# Altium PCB 电子脚铐本体主控板V3-修改.PcbDoc
Units mil, origin at the board's own origin, x right, y up, seen from the top; angles counter-clockwise.
Board outline 787.4 x 1968.51 mil, 2 copper layers (Top Layer, Bottom Layer), stack 42.17 mil thick; 69 components, 45 nets, 207 pads, 43 vias.
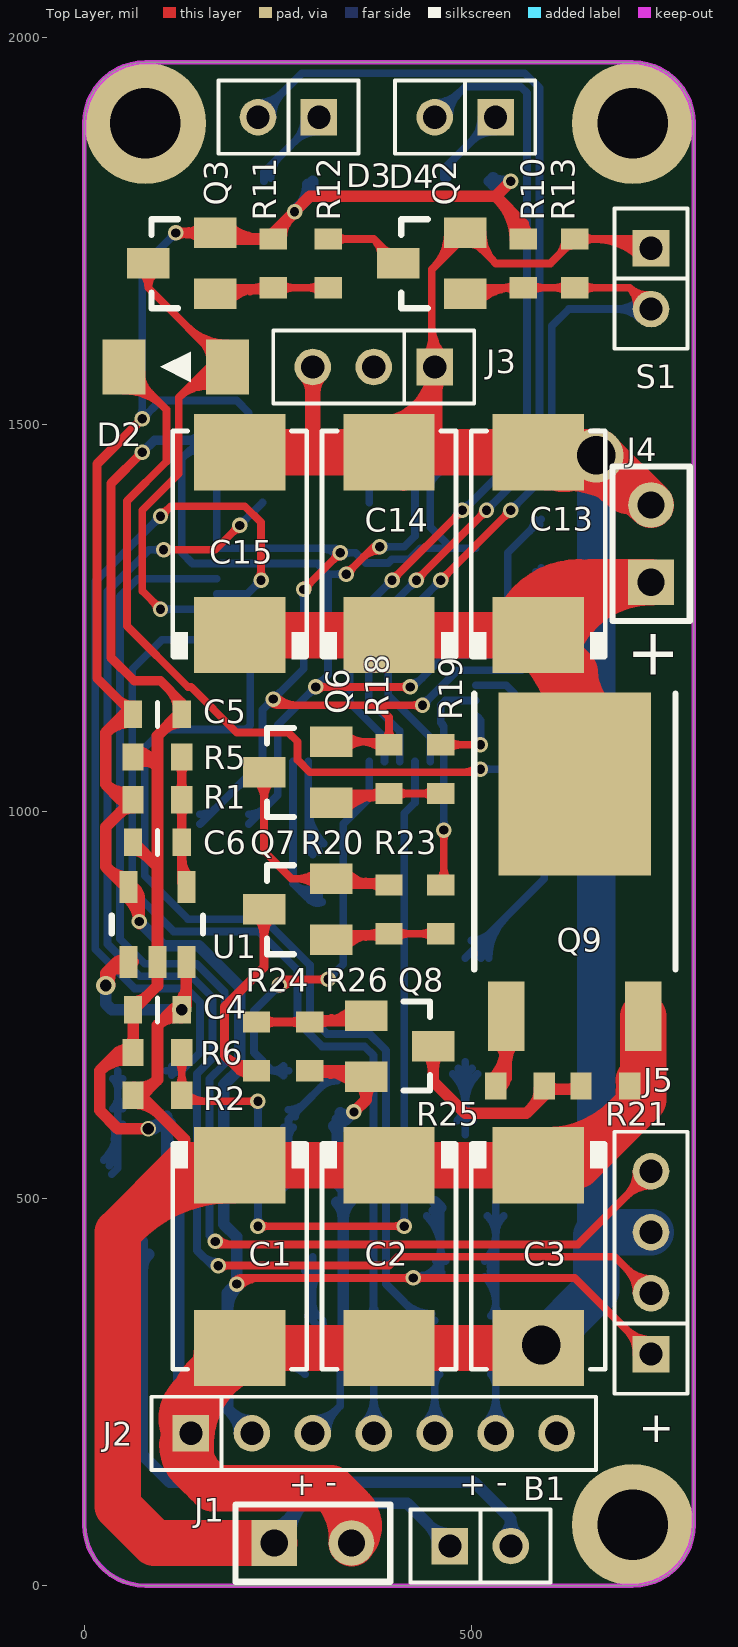
[diagram p0: Top Layer view]
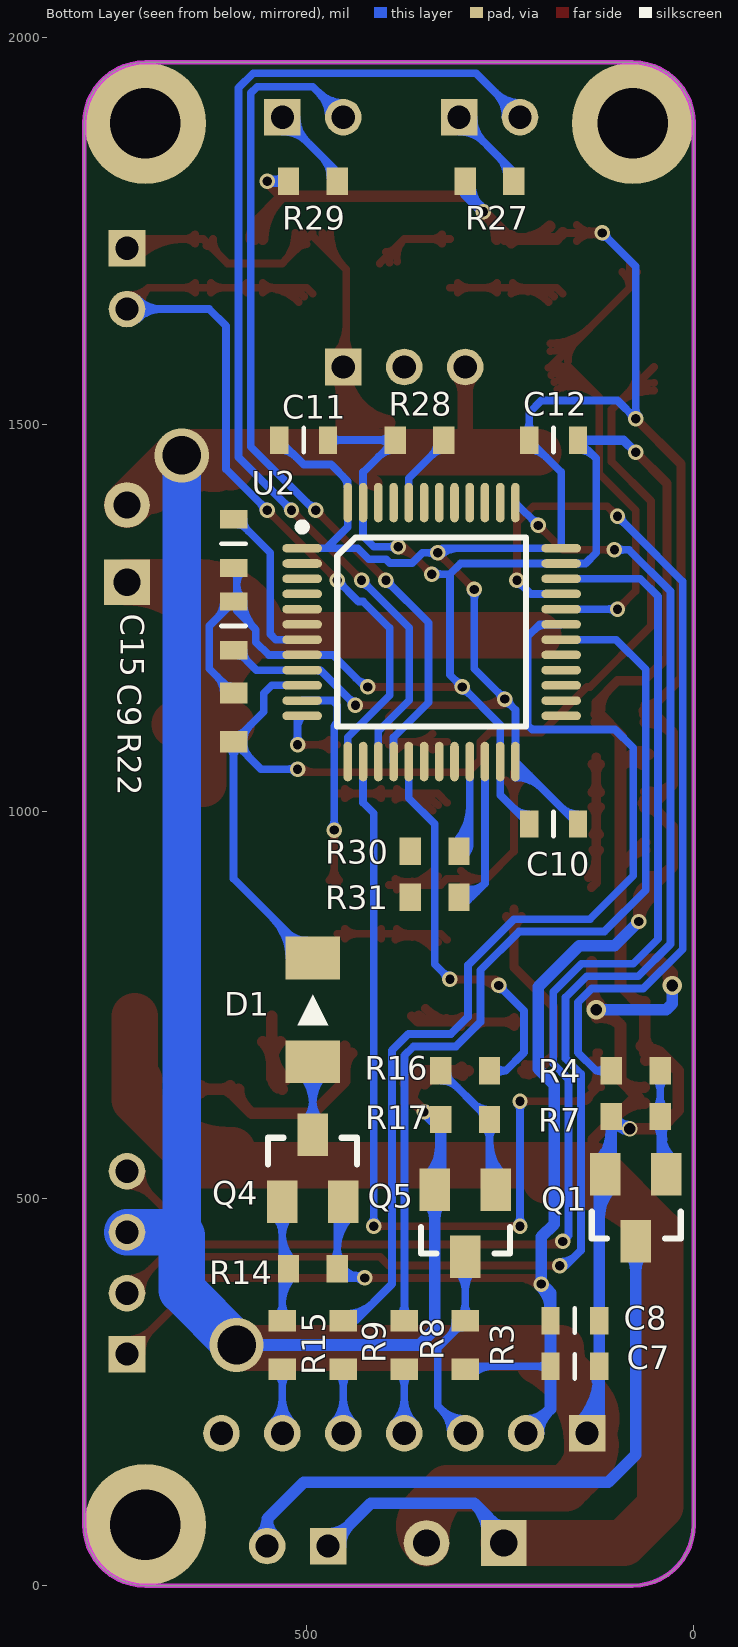
[diagram p1: Bottom Layer view, seen from below]
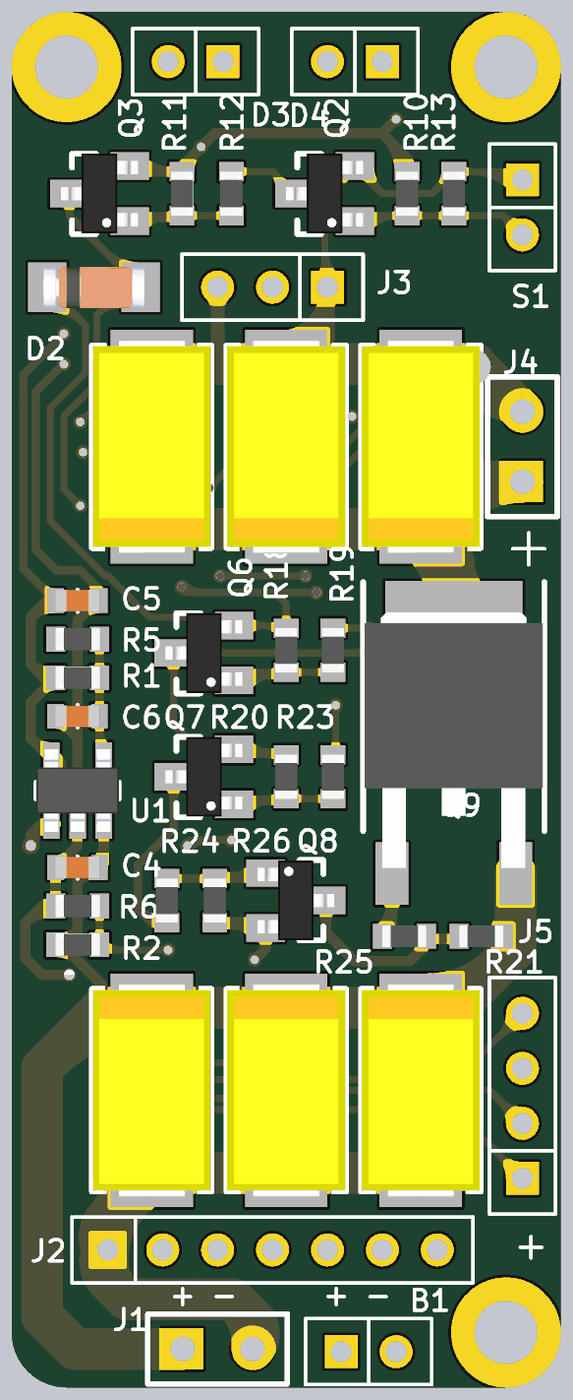
[diagram p2: 3D render of the assembled board from above, using the file's embedded part models]
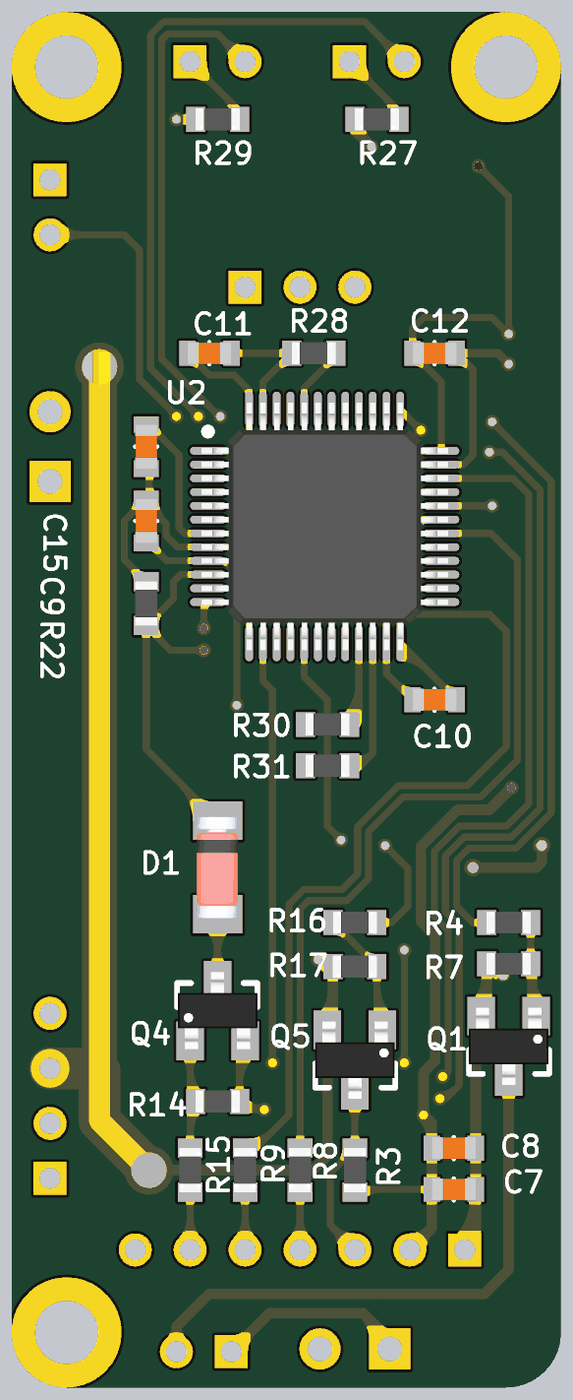
[diagram p3: 3D render of the assembled board from below, using the file's embedded part models]

## Layer stack, top to bottom
Top Solder: solder mask 0.4, Solder Resist, Dk 3.5
Top Layer: signal copper 1.4
Dielectric 1: dielectric 39.3701, FR-4, Dk 4.8
Bottom Layer: signal copper 1.4
Bottom Solder: solder mask 0.4, Solder Resist, Dk 3.5

## Board outline
0,78.74 ccw(c78.74,78.74) 78.74,0 708.66,0 ccw(c708.66,78.74) 787.4,78.74 787.4,1889.77 ccw(c708.66,1889.77) 708.66,1968.51 78.74,1968.51 ccw(c78.74,1889.77) 0,1889.77

## Design rules (kind name [scope] priority, off if disabled: settings)
Clearance [All] p1: gap=6
ComponentClearance [All] p1: gap=0 collisioncheckmode=3 verticalgap=0 showdistances=FALSE
Height [All] p1: minheight=0 maxheight=2000 prefheight=500
HoleSize [All] p1: absolutevalues=TRUE maxlimit=200 minlimit=1 maxpercent=80.000 minpercent=20.000
HoleToHoleClearance [All] p1: gap=6 allowstackedmicrovias=TRUE
MinimumSolderMaskSliver [All] p1: minsoldermaskwidth=0
PlaneConnect [All] p1: planeconnectstyle=Direct reliefexpansion=20 reliefentries=4 reliefconductorwidth=10 reliefairgap=10
PolygonConnect [All] p1: connectstyle=Direct reliefconductorwidth=10 reliefentries=4 polygonreliefangle="90 Angle" airgapwidth=10
RoutingVias [All] p1: holewidth=28 width=50 viastyle="Through Hole" minholewidth=8 minwidth=12 maxholewidth=200 maxwidth=300
SilkToSilkClearance [All] p1: silktosilkclearance=0
SilkToSolderMaskClearance [IsPad] p1: minsilkscreentomaskgap=0 clearancetoexposedcopper=TRUE
SolderMaskExpansion [All] p1: expansion=4
Width [All] p1: maxlimit=157.48 minlimit=10 preferedwidth=10
21 further rules are at their usual default settings.

## Components (designator, comment, footprint, x,y, rotation, side; value= is the part's Value field where it differs from the comment)
B1 "beep" Jk1*2-2.0 511.81,51.18 r0 top
C1 "210uF/16V" C7343 200.79,425.2 r270 top
C2 "210uF/16V" C7343 393.7,425.2 r270 top
C3 "210uF/16V" C7343 586.61,425.2 r270 top
C4 "0.1uF" C0603 94.49,744.09 r0 top
C5 "10uF" C0603 94.49,1125.98 r0 top
C6 "470pF" C0603 94.49,960.63 r180 top
C7 "10uF" C0603 153.54,283.46 r180 bottom
C8 "0.1uF" C0603 153.54,342.52 r180 bottom
C9 "0.1uF" C0603 594.49,1240.16 r90 bottom
C10 "0.1uF" C0603 181.1,984.25 r0 bottom
C11 "0.1uF" C0603 503.94,1480.31 r180 bottom
C12 "0.1uF" C0603 181.1,1480.31 r180 bottom
C13 "210uF/16V" C7343 586.61,1346.46 r90 top
C14 "210uF/16V" C7343 393.7,1346.46 r90 top
C15 "0.1uF" C0603 594.49,1346.46 r270 bottom
C15 "210uF/16V" C7343 200.79,1346.46 r90 top
D1 "1N4148" SOD-80-S 492.13,744.09 r90 bottom
D2 "1N4148" SOD-80-S 118.11,1574.8 r180 top
D3 "LED" Jk1*2-2.0 263.78,1897.64 r180 top
D4 "LED" Jk1*2-2.0 492.13,1897.64 r180 top
J1 "Jack 1x2" HDR1X2 295.28,55.12 r0 top
J2 "Jack 1x7" Jk1*7-2.0 374.02,196.85 r0 top
J3 "Jack 1x3" Jk1*3-2.0 374.02,1574.8 r180 top
J4 "Jack 1x2" HDR1X2 732.28,1346.46 r90 top
J5 "SHD1X4-2.00" Jk1*4-2.0 732.28,417.32 r90 top
Q1 "S8050" SOT-23 74.8,488.19 r0 bottom
Q2 "S8050" SOT-23 448.82,1708.66 r90 top
Q3 "S8550" SOT-23 125.98,1708.66 r90 top
Q4 "S8550" SOT-23 492.13,539.37 r180 bottom
Q5 "S8050" SOT-23 295.28,468.5 r0 bottom
Q6 "S8550" SOT-23 275.59,1051.18 r90 top
Q7 "S8550" SOT-23 275.59,874.02 r90 top
Q8 "S8050" SOT-23 407.48,696.85 r270 top
Q9 "2SA1615" TO-252 633.86,885.83 r0 top
R1 "100K" R0603 94.49,1015.75 r0 top
R2 "200K" R0603 94.49,633.86 r0 top
R3 "200K" R0603 295.28,311.02 r270 bottom
R4 "20K" R0603 74.8,665.35 r180 bottom
R5 "160K" R0603 94.49,1070.87 r180 top
R6 "100K" R0603 94.49,688.98 r180 top
R7 "10K" R0603 74.8,606.3 r180 bottom
R8 "10R" R0603 374.02,311.02 r90 bottom
R9 "10R" R0603 452.76,311.02 r90 bottom
R10 "20K" R0603 566.93,1708.66 r270 top
R11 "200K" R0603 244.09,1708.66 r270 top
R12 "100K" R0603 314.96,1708.66 r90 top
R13 "10K" R0603 633.86,1708.66 r270 top
R14 "200K" R0603 492.13,409.45 r180 bottom
R15 "100k" R0603 531.5,311.02 r270 bottom
R16 "20K" R0603 295.28,665.35 r180 bottom
R17 "10K" R0603 295.28,602.36 r0 bottom
R18 "200K" R0603 393.7,1055.12 r90 top
R19 "100K" R0603 460.63,1055.12 r90 top
R20 "200K" R0603 393.7,874.02 r90 top
R21 "200K" R0603 673.23,645.67 r180 top
R22 "200K" R0603 594.49,1122.05 r90 bottom
R23 "100K" R0603 460.63,874.02 r90 top
R24 "20K" R0603 222.44,696.85 r270 top
R25 "1K" R0603 562.99,645.67 r0 top
R26 "10K" R0603 291.34,696.85 r90 top
R27 "1K" R0603 263.78,1814.96 r180 bottom
R28 "100K" R0603 354.33,1480.31 r0 bottom
R29 "1K" R0603 492.13,1814.96 r180 bottom
R30 "NC" R0603 334.65,948.82 r180 bottom
R31 "NC" R0603 334.65,889.76 r180 bottom
S1 "Switch" Jk1*2-2.0 732.28,1688.98 r270 top
U1 "MIC5219YM5" SOT-23-5 94.49,854.33 r90 top
U2 "STM32F103CB" LQFP48 338.58,1232.28 r180 bottom locked

## Footprints (in the part's own frame and the unit in brackets; to place one, negate y for a bottom-side part, rotate by r counter-clockwise, add the part's x,y. Pads: shape width x height; smd on the part's side, far side on the other; paste and mask are expansions set on the pad)
C0603 [mm]
  rect 0.6x0.9 smd: 1(-0.8,0) 2(0.8,0)
  silkscreen extent 0,-0.4 0,0.4, body extent -0.8,-0.4 0.8,0.4, height 0.5
C7343 [mm] "100uF/25V"
  rect 2.5x3 smd: 1(-3,0) 2(3,0)
  silkscreen extent -3.8,-2.2 3.7,2.2, body extent -3.87,-2.15 3.87,2.15, height 2.9
HDR1X2 [mm] "Connector; Header; 2 Position"
  rect 1.5x1.5 hole 0.9: 1(-1.27,0)
  round 1.5 hole 0.9: 2(1.27,0)
  silkscreen extent -2.54,-1.27 2.54,1.27
Jk1*2-2.0 [mm]
  rect 1.2x1.2 hole 0.762: 1(-1,0)
  round 1.2 hole 0.762: 2(1,0)
  silkscreen extent -2.3,-1.2 2.3,1.2
Jk1*3-2.0 [mm]
  rect 1.2x1.2 hole 0.762: 1(-2,0)
  round 1.2 hole 0.762: 2(0,0) 3(2,0)
  silkscreen extent -3.3,-1.2 3.3,1.2
Jk1*4-2.0 [mm] "4P，直插，2.0mm间距，排母"
  rect 1.2x1.2 hole 0.762: 1(-3,0)
  round 1.2 hole 0.762: 2(-1,0) 3(1,0) 4(3,0)
  silkscreen extent -4.3,-1.2 4.3,1.2, body extent -4.25,-1.22 4.25,1.18, height 4.3
Jk1*7-2.0 [mm]
  rect 1.2x1.2 hole 0.762: 1(-6,0)
  round 1.2 hole 0.762: 2(-4,0) 3(-2,0) 4(0,0) 5(2,0) 6(4,0) 7(6,0)
  silkscreen extent -7.3,-1.2 7.3,1.2
LQFP48 [mm]
  oval 1.3x0.28 smd: 1(-4.25,2.75) 2(-4.25,2.25) 3(-4.25,1.75) 4(-4.25,1.25) 5(-4.25,0.75) 6(-4.25,0.25) 7(-4.25,-0.25) 8(-4.25,-0.75) 9(-4.25,-1.25) 10(-4.25,-1.75) 11(-4.25,-2.25) 12(-4.25,-2.75) 25(4.25,-2.75) 26(4.25,-2.25) 27(4.25,-1.75) 28(4.25,-1.25) 29(4.25,-0.75) 30(4.25,-0.25) 31(4.25,0.25) 32(4.25,0.75) 33(4.25,1.25) 34(4.25,1.75) 35(4.25,2.25) 36(4.25,2.75)
  oval 0.28x1.3 smd: 13(-2.75,-4.25) 14(-2.25,-4.25) 15(-1.75,-4.25) 16(-1.25,-4.25) 17(-0.75,-4.25) 18(-0.25,-4.25) 19(0.25,-4.25) 20(0.75,-4.25) 21(1.25,-4.25) 22(1.75,-4.25) 23(2.25,-4.25) 24(2.75,-4.25) 37(2.75,4.25) 38(2.25,4.25) 39(1.75,4.25) 40(1.25,4.25) 41(0.75,4.25) 42(0.25,4.25) 43(-0.25,4.25) 44(-0.75,4.25) 45(-1.25,4.25) 46(-1.75,4.25) 47(-2.25,4.25) 48(-2.75,4.25)
  silkscreen extent -4.38,-3.1 3.1,3.57, body extent -4.49,-4.5 4.51,4.5, height 1.8
R0603 [mm]
  rect 0.7x0.9 smd: 1(-0.8,0) 2(0.8,0)
  body extent -0.8,-0.4 0.8,0.4, height 0.37
SOD-80-S [mm]
  rect 1.4x1.8 smd: 1(-1.7,0) 2(1.7,0)
  silkscreen extent -0.5,-0.5 0.5,0.5, body extent -1.85,-0.79 1.85,0.81, height 1.6
SOT-23 [mm]
  rect 1x1.4 smd: 1(-1,-1.1) 2(1,-1.1) 3(0,1.1)
  silkscreen extent -1.47,0.13 1.45,1, body extent -1.45,-1.4 1.45,1.4, height 1.3
SOT-23-5 [mm]
  rect 1.05x0.6 smd: 1(-1.225,0.95) 2(-1.225,0) 3(-1.225,-0.95) 4(1.225,-0.95) 5(1.225,0.95)
  silkscreen extent -0.3,-1.5 0.3,1.5, body extent -1.5,-1.5 1.5,1.5, height 1.2
TO-252 [mm]
  rect 1.2x2.28 smd: 1(-2.25,-3.816) 3(2.25,-3.816)
  rect 5x6 smd: 2(0,3.816)
  silkscreen extent -3.3,-2.27 3.3,6.78, body extent -3.25,-3.62 3.25,5.68, height 2.3

## Part data
B1: library part Speaker, "Loudspeaker"
C1 C2 C3 C13 C14 C15: library part "Cap Poll"
C4 C9 C10 C11 C12 C15: library part "Cap Semi"
C5 C6 C7 C8: library part CAP, "CAP"
D1 D2: library part DIODE-SWITCHING, "Silicon Epitaxial Planar Diodes"
J1 J2 J3 J4: "插座"
J5: library part HEADER1X4
Q1 Q2 Q5 Q8: "NPN triode, 0.5A Max"
Q3 Q4 Q6 Q7: "PNP triode"
Q9: library part MJD122
R1 R2 R5 R6 R27 R28 R29 R30 R31: library part Res
R3 R4 R7 R8 R9 R10 R11 R12 R13 R14 R15 R16 R17 R18 R19 R20 R21 R22 R23 R24 R25 R26: library part RES, "Resistor"
S1: library part Sw
U1: library part MIC5205
U2: library part STM32F103Cx

## Free pads (board coordinates)
  round 157.48 hole 90.55: ""(78.74,1889.77) ""(708.66,78.74) ""(708.66,1889.77)

## Via types
v1: diameter 20, hole 12, Top Layer to Bottom Layer, tented both sides, 38 vias
v2: diameter 70, hole 50, Top Layer to Bottom Layer, tented both sides, 2 vias
v3: diameter 25, hole 15, Top Layer to Bottom Layer, tented both sides, 2 vias
v4: diameter 20, hole 15, Top Layer to Bottom Layer, tented both sides, 1 vias

## Nets (pads, with @x,y where several pads share a name; then routed paths per layer and width w, separated by ;. In a path a pad name is that pad's centre, name@x,y a point inside that pad or via, vN(x,y) a via of type N, cw(c..) or ccw(c..) an arc to the next point about the centre after c; other vN are vias at no path point)
+3.3V: C5.1 C7.1 C8.1 C9.1 C10.1 C11.1 C12.1 J2.2 J5.1 Q3.2 Q4.2 Q6.2 R1.1 R3.2 R10.1 R11.1 R14.2 R18.2 R27.1 R29.1 U1.5 U2.1 U2.9 U2.24 U2.36 U2.48 | length 6906.1
  Top Layer w10: v1(118.11,1748.03) Q3.2 ; v1@120.61,1743.7 cw(c130.12,1727.24) 135.04,1745.6 ; v1@120.61,1752.36 ccw(c130.12,1768.83) 135.04,1750.46 ; v1@121.65,1744.5 cw(c130.18,1735.96) 130.18,1748.03 cw(c130.18,1760.1) v1@121.65,1751.57 ; Q3.2@151.03,1737.65 ccw(c125.96,1712.58) 125.96,1748.03 ccw(c125.96,1783.48) Q3.2@151.03,1758.42 ; v1@193.31,393.3 cw(c203.79,382.83) 203.79,397.64 ; v1(196.85,389.76) 204.72,397.64 ; v1@197.14,394.76 ccw(c197.72,404.64) 204.72,397.64 ; v1@200.39,386.23 cw(c227.93,358.68) 227.93,397.64 ; v1@201.84,390.06 cw(c211.72,390.64) 204.72,397.64 ; v1@240.56,1142.13 ccw(c251.03,1152.61) 251.03,1137.8 ; v1(244.09,1145.67) 251.97,1137.8 ; v1@244.39,1140.68 cw(c244.97,1130.8) 251.97,1137.8 ; v1@247.63,1149.2 ccw(c275.18,1176.75) 275.18,1137.8 ; v1@249.09,1145.38 ccw(c258.97,1144.8) 251.97,1137.8 ; v1(283.46,1287.4) v1(330.71,1334.65) ; v1@283.46,1292.4 ccw(c283.46,1304.47) 292,1295.94 ccw(c300.54,1287.4) v1@288.46,1287.4 ; Q6.2 389.76,1090.55 R18.2 393.7,1122.05 377.95,1137.8 ; v1@325.71,1334.65 cw(c313.64,1334.65) 322.17,1326.11 cw(c330.71,1317.57) v1@330.71,1329.65 ; Q6.2@337.16,1080.17 cw(c362.22,1055.1) 362.22,1090.55 cw(c362.22,1126) Q6.2@337.16,1100.94 ; 359.06,1090.55 cw(c359.06,1055.91) R18.2@383.56,1080.41 ; R18.2@387.49,1092.82 ccw(c372.51,1107.81) 393.7,1107.81 ccw(c414.9,1107.81) R18.2@399.91,1092.82 ; v1@421.66,394.1 ccw(c413.13,385.57) 413.13,397.64 ccw(c413.13,409.71) v1@421.66,401.17 ; v1@428.73,394.1 cw(c437.27,385.57) 437.27,397.64 cw(c437.27,409.71) v1@428.73,401.17 ; v1@433.47,1134.26 ccw(c424.94,1125.72) 424.94,1137.8 ccw(c424.94,1149.87) v1@433.47,1141.33 ; v1(437.01,1137.8) 377.95,1137.8 ; J5.1@713.66,299.21 ccw(c668.7,299.21) 700.49,331 ccw(c732.28,362.79) J5.1@732.28,317.83 ; J5.1 633.86,397.64 v1(425.2,397.64) 204.72,397.64 ; 251.97,1137.8 377.95,1137.8
  Top Layer w12: 42.99,1145.99 ccw(c62.99,1165.99) C5.1@62.99,1137.7 ; C5.1 16.5,1172.48 16.5,1449.57 v1(74.8,1507.87)
  Top Layer w15: 29.56,927.13 ccw(c57.09,954.65) U1.5@57.09,915.73 ; 45.55,998.31 cw(c62.99,980.87) R1.1@62.99,1005.53 ; 46.56,1016.43 ccw(c60.47,1030.33) R1.1@65,1011.2 ; C5.1@51.23,1126.04 cw(c62.68,1114.59) C5.1@63.6,1130.75 ; U1.5@54.37,890.36 cw(c26.19,855.68) v1@70.87,855.68 ; R1.1@58.55,1011.31 ccw(c47.83,1000.59) 47.83,1015.75 ccw(c47.83,1030.91) R1.1@58.55,1020.19 ; U1.5@59.39,890.06 cw(c64.33,882.24) 70.87,888.78 ; R1.1@61.54,1025.8 cw(c53.18,1061.06) 27.56,1035.43 ; C5.1@62.75,1115.77 ccw(c60.12,1069.81) 27.56,1102.36 ; C5.1 51.18,1125.98 27.56,1102.36 ; U1.5@63.83,902 cw(c51.81,887.21) 70.87,887.21 ; v1(70.87,858.27) 70.87,888.78 ; Q3.2 177.17,1740.16 R11.1 244.09,1748.03 v1(271.65,1775.59) 291.34,1795.28 531.5,1795.28 ; Q3.2@185.78,1756.65 ccw(c225.59,1796.46) 225.59,1740.16 ; R11.1@235.72,1735.72 ccw(c225,1725) 225,1740.16 ccw(c225,1755.32) R11.1@235.72,1744.6 ; R11.1@254.31,1740.16 cw(c297.99,1740.16) v1@267.1,1771.04 ; 265.18,1767.71 cw(c275.33,1761.85) v1@272.3,1773.18 ; 535.57,1791.2 cw(c484.52,1740.16) R10.1@556.71,1740.16 ; v1(551.18,1814.96) 531.5,1795.28 ; 561.18,1765.6 cw(c535.74,1740.16) R10.1@571.71,1740.16 ; R10.1@562.49,1744.6 ccw(c551.77,1755.32) 566.93,1755.32 ccw(c582.09,1755.32) R10.1@571.37,1744.6 ; R10.1 566.93,1759.84 531.5,1795.28 ; 27.56,1035.43 47.24,1015.75 R1.1 27.56,980.31 27.56,929.13 54.13,902.56 U1.5 70.87,888.78 ; 27.56,1035.43 27.56,1102.36
  Bottom Layer w10: v1@71.27,1511.41 ccw(c62.73,1519.95) 74.8,1519.95 ccw(c86.87,1519.95) v1@78.34,1511.41 ; v1@74.8,1512.87 ccw(c74.8,1524.95) 83.34,1516.41 ccw(c91.87,1507.87) v1@79.8,1507.87 ; v1@113.11,1748.03 cw(c101.04,1748.03) 109.57,1739.5 cw(c118.11,1730.96) v1@118.11,1743.03 ; v1(118.11,1748.03) 74.8,1704.72 v1(74.8,1507.87) 98.43,1531.5 196.85,1531.5 212.6,1515.75 C12.1 171.26,1438.98 U2.36 324.8,1340.55 v1(330.71,1334.65) 350.39,1334.65 363.52,1321.52 392.64,1321.52 397.64,1326.52 420.01,1326.52 434.04,1340.55 474.41,1340.55 ; C10.1 U2.24 230.32,1131.89 v1(244.09,1145.67) 283.46,1185.04 v1(283.46,1287.4) ; C10.1@149.61,996.97 ccw(c149.61,1027.67) 171.32,1005.96 ; C7.1 R3.2@291.34,283.46 ; C7.1@189.86,278.65 cw(c201.48,267.02) 201.48,283.46 cw(c201.48,299.91) C7.1@189.86,288.28 ; 190.89,1458.61 cw(c212.6,1436.9) C12.1@212.6,1467.6 ; 195.17,1029.81 cw(c230.32,994.66) U2.24@230.32,1044.37 ; C12.1@207.78,1491.04 ccw(c196.16,1502.66) 212.6,1502.66 ccw(c229.04,1502.66) C12.1@217.41,1491.04 ; 212.24,1046.88 cw(c230.32,1028.8) U2.24@230.32,1054.37 ; U2.24@229.31,1063.95 cw(c230.32,1062.94) U2.24@230.32,1064.37 ; v1@239.09,1145.67 cw(c227.02,1145.67) 235.56,1137.13 cw(c244.09,1128.6) v1@244.09,1140.67 ; v1@244.09,1150.67 ccw(c244.09,1162.74) 252.63,1154.2 ccw(c261.17,1145.67) v1@249.09,1145.67 ; 260.64,283.46 cw(c260.64,248.83) R3.2@285.13,273.32 ; v1@279.93,1283.87 cw(c271.39,1275.33) 283.46,1275.33 cw(c295.54,1275.33) v1@287,1283.87 ; 304.38,1340.55 cw(c304.38,1308.32) v1@327.17,1331.11 ; v1@334.24,1331.11 cw(c342.78,1322.57) 342.78,1334.65 cw(c342.78,1346.72) v1@334.24,1338.18 ; v1@427.7,401.97 ccw(c433.73,412.42) 436.86,400.76 ccw(c439.98,389.1) v1@429.53,395.14 ; v1@428.73,394.1 cw(c437.27,385.57) 437.27,397.64 cw(c437.27,409.71) v1@428.73,401.17 ; v1(437.01,1137.8) 437.01,1137.92 482.16,1183.07 U2.9 564.96,1183.07 C9.1@590.55,1208.66 ; v1@437.01,1142.8 ccw(c437.01,1154.57) 445.33,1146.24 ; v1@442.01,1137.8 cw(c454.38,1137.8) 445.63,1146.54 ; Q4.2@442.37,477.81 cw(c398.29,433.73) 460.63,433.73 ; 446.47,397.64 ccw(c446.47,417.24) R14.2@461.57,404.73 ; U2.48@447.36,1419.68 cw(c466.66,1419.68) 453.01,1433.33 ; Q4.2@449.44,484.88 cw(c422.44,457.87) 460.63,457.87 ; R14.2@453.87,411.11 cw(c425.2,434.88) v1(425.2,397.64) 448.82,397.64 R14.2 Q4.2@460.63,488.19 ; R14.2@454.42,419.59 ccw(c439.43,434.58) 460.63,434.58 ccw(c481.83,434.58) R14.2@466.84,419.59 ; 478.69,1179.6 cw(c485.83,1172.47) U2.9@485.83,1182.56 ; U2.1 474.41,1340.55 ; 513.72,1458.61 cw(c535.43,1436.9) C11.1@535.43,1467.6 ; C11.1 503.94,1448.82 468.5,1448.82 446.85,1427.17 U2.48 446.85,1368.11 474.41,1340.55 ; 575.56,1193.67 ccw(c560.58,1208.66) C9.1@581.77,1208.66 ; C9.1@580.32,1198.43 cw(c588.58,1190.16) C9.1@588.58,1201.85
  Bottom Layer w15: v1(70.87,858.27) 102.36,826.77 147.96,826.77 200.79,773.94 200.79,667.75 180.17,647.13 180.17,467.24 196.73,450.68 196.73,389.89 185.04,378.2 C8.1 C7.1 185.04,228.35 J2.2 ; C8.1@185.04,355.21 cw(c231.4,355.21) v1@198.62,388 ; 185.04,373.23 cw(c199.24,373.23) v1@197.21,387.29 ; J2.2@200.41,196.85 ccw(c161.49,196.85) 189.01,224.37 ccw(c216.54,251.89) J2.2@216.54,212.97 ; v1@271.01,1778.01 ccw(c267.97,1789.33) 278.12,1783.47 ; v1(271.65,1775.59) 295.28,1799.21 R27.1 ; v1@276.2,1780.14 ccw(c245.32,1811.02) R27.1@289,1811.02 ; Q4.2 Q4.2@460.63,488.19 ; R29.1 v1(551.18,1814.96) ; R29.1@528.06,1810.52 cw(c538.78,1799.8) 538.78,1814.96 cw(c538.78,1830.12) R29.1@528.06,1819.4
ADDECCUT: Q2.1 R10.2 R13.2 S1.2 U2.13 | length 1483.1
  Top Layer w10: v1(460.63,1299.21) v1(551.18,1389.76) ; v1@460.63,1304.21 ccw(c460.63,1316.28) 469.17,1307.75 ccw(c477.7,1299.21) v1@465.63,1299.21 ; Q2.1 500,1677.17 R10.2 R13.2 704.72,1677.17 S1.2 ; Q2.1@503.31,1665.98 cw(c530.32,1638.97) 530.32,1677.17 ; Q2.1@510.38,1658.91 cw(c554.46,1614.83) R10.2@554.46,1677.17 ; v1@546.18,1389.76 cw(c534.11,1389.76) 542.65,1381.23 cw(c551.18,1372.69) v1@551.18,1384.76 ; R10.2@556.78,1670.96 ccw(c541.8,1655.97) 541.8,1677.17 ccw(c541.8,1698.36) R10.2@556.78,1683.37 ; R10.2@577.07,1670.96 cw(c592.06,1655.97) 592.06,1677.17 cw(c592.06,1698.36) R10.2@577.07,1683.37 ; R13.2@623.71,1670.96 ccw(c608.73,1655.97) 608.73,1677.17 ccw(c608.73,1698.36) R13.2@623.71,1683.37 ; R13.2@644,1670.96 cw(c658.99,1655.97) 658.99,1677.17 cw(c658.99,1698.36) R13.2@644,1683.37 ; S1.2@713.77,1651.58 ccw(c682.47,1654.91) 704.73,1677.16 ccw(c726.98,1699.42) S1.2@730.31,1668.12
  Bottom Layer w10: U2.13 446.85,1096.46 392.71,1150.6 392.71,1237.44 426.92,1271.65 433.07,1271.65 v1(460.63,1299.21) ; v1@455.63,1299.21 cw(c443.56,1299.21) 452.09,1290.68 cw(c460.63,1282.14) v1@460.63,1294.21 ; v1(551.18,1389.76) 604.18,1442.76 604.18,1627.8 625.98,1649.61 S1.2 ; v1@551.18,1394.76 ccw(c551.18,1406.83) 559.72,1398.3 ccw(c568.25,1389.76) v1@556.18,1389.76 ; S1.2@719.12,1636.44 ccw(c687.33,1604.65) 687.33,1649.61 ccw(c687.33,1694.56) S1.2@719.12,1662.77
ADPOW: R2.2 R6.1 U2.14 | length 1334.1
  Top Layer w10: R2.2@119.78,644 ccw(c104.79,658.99) 125.98,658.99 ccw(c147.18,658.99) R2.2@132.19,644 ; R6.1@119.78,678.83 cw(c104.79,663.84) 125.98,663.84 cw(c147.18,663.84) R6.1@132.19,678.83 ; R6.1@122.05,688.98 R6.1 125.98,641.73 141.73,625.98 ; R2.2@132.19,636.13 ccw(c156.68,660.62) 156.68,625.98 ; R2.2@134.57,631.77 ccw(c141.73,633.31) 141.73,625.98 ; v1@220.87,622.45 ccw(c212.34,613.91) 212.34,625.98 ccw(c212.34,638.06) v1@220.87,629.52 ; v1(224.41,464.57) v1(413.39,464.57) v1@417.32,464.57 ; v1(224.41,625.98) 141.73,625.98 ; v1@227.94,461.03 cw(c236.48,452.5) 236.48,464.57 cw(c236.48,476.64) v1@227.94,468.1 ; v1@409.85,461.03 ccw(c401.31,452.5) 401.31,464.57 ccw(c401.31,476.64) v1@409.85,468.1
  Bottom Layer w10: v1@220.87,468.1 ccw(c212.34,476.64) 224.41,476.64 ccw(c236.48,476.64) v1@227.94,468.1 ; v1@220.87,622.45 cw(c212.34,613.91) 224.41,613.91 cw(c236.48,613.91) v1@227.94,622.45 ; v1(224.41,464.57) v1(224.41,625.98) ; v1@409.85,468.1 ccw(c401.31,476.64) 413.39,476.64 ccw(c425.46,476.64) v1@416.92,468.1 ; v1(413.39,464.57) 413.39,998.03 427.17,1011.81 U2.14
BAT: B1.1 C1.1 C2.1 C3.1 C4.2 J1.1 Q9.3 R2.1 R21.1 U1.1 U1.3 | length 3011.3
  Top Layer w15: v3(27.56,775.59) 27.56,791.34 ; v3@32.5,776.33 cw(c66.95,781.48) 42.32,806.1 ; 40.21,803.98 cw(c52.91,791.28) U1.1@63.21,806 ; U1.1@54.62,793.71 ccw(c42.5,776.4) 27.56,791.34 ; U1.1 42.32,806.1 ; R2.1@62.99,623.64 cw(c62.99,575.77) 96.84,609.62 ; R2.1@64.09,643.98 ccw(c70.12,677.91) 94.49,653.54 ; 97.29,727.21 cw(c125.98,698.51) C4.2@125.98,739.09 ; C4.2@114.65,744.58 cw(c125.21,734.02) C4.2@127.93,748.7 ; C4.2@122.45,747.63 ccw(c99.66,770.42) 131.89,770.42 ; C4.2@122.94,753.05 ccw(c101.32,774.66) 131.89,774.66 ; C4.2@125.2,733.95 ccw(c118.91,699.99) 94.49,724.41 ; 128.79,763.19 ccw(c141.22,756.02) C4.2@129.92,747.18 ; 129.92,543.31 129.92,576.54 76.54,629.92 70.87,629.92 94.49,653.54 ; U1.3 131.89,750 v3(125.98,744.09) 114.17,744.09 94.49,724.41 ; C1.1 C1.1@200.79,559.06 ; 27.56,791.34 42.32,806.1 ; 94.49,653.54 94.49,724.41
  Top Layer w60: 53.97,467.36 cw(c190.94,330.39) C1.1@190.94,524.09 ; J1.1 90.55,55.12 43.31,102.36 43.31,456.69 129.92,543.31 C1.1 C2.1 C3.1 637.8,543.31 722.44,627.95 Q9.3 ; C3.1@596.46,562.52 ccw(c596.46,708.7) 699.82,605.34 ; R21.1@716.19,638.14 ccw(c701.11,653.22) 722.44,653.22 ; R21.1@716.19,653.2 cw(c701.11,638.12) 722.44,638.12 ccw(c701.11,638.12) R21.1@716.19,653.2
  Bottom Layer w15: v3(27.56,775.59) 27.56,751.97 35.43,744.09 v3(125.98,744.09) ; J1.1 245.28,68.11 283.46,106.3 ; J1.1@245.28,77.15 ccw(c245.28,98.96) J1.1@260.7,83.53 ; J1.1@252.24,56.04 cw(c286.25,60.57) 261.99,84.82 ; J1.1@267.11,58.02 cw(c324.15,65.61) 283.46,106.3 ; B1.1@456.32,51.18 ccw(c417.4,51.18) 444.92,78.7 ccw(c472.44,106.23) B1.1@472.44,67.3 ; B1.1 417.32,106.3 283.46,106.3
BOOT0: R28.1 U2.44 | length 123.3
  Bottom Layer w10: R28.1@322.83,1467.6 cw(c322.83,1446.4) 337.82,1461.39 cw(c352.81,1476.38) R28.1@331.61,1476.38 ; R28.1@326.77,1472.44 368.11,1431.1 U2.44
CTRBEEP: R4.1 U2.33 | length 1264.9
  Top Layer w10: v1(98.43,1381.89) 111.55,1395.02 207.35,1395.02 228.35,1374.02 v1(228.35,1299.21) ; v1@98.43,1386.89 ccw(c98.43,1398.96) 106.96,1390.43 ccw(c115.5,1381.89) v1@103.43,1381.89 ; v1@224.81,1302.75 ccw(c216.28,1311.28) 228.35,1311.28 ccw(c240.42,1311.28) v1@231.88,1302.75
  Bottom Layer w10: v1@93.43,1381.89 cw(c81.35,1381.89) 89.89,1373.35 cw(c98.43,1364.82) v1@98.43,1376.89 ; v1(98.43,1381.89) 78.74,1362.2 14,1297.46 14,822.63 64.98,771.65 131.66,771.65 149.48,753.83 149.48,688.85 125.98,665.35 ; R4.1 125.98,665.35 ; R4.1@112.83,659.49 cw(c125.98,647.68) 125.98,665.35 ; R4.1@112.83,671.22 ccw(c125.98,683.03) 125.98,665.35 ; U2.33 210.63,1281.5 v1(228.35,1299.21) ; v1@223.35,1299.21 cw(c211.28,1299.21) 219.81,1290.68 cw(c228.35,1282.14) v1@228.35,1294.21
CTRSHOCK: R23.2 U2.11 | length 354.5
  Top Layer w10: R23.2@458.36,911.72 ccw(c443.37,926.71) 464.57,926.71 ccw(c485.76,926.71) R23.2@470.77,911.72 ; R23.2 464.57,909.45 v1(464.57,976.38) ; v1@461.03,972.84 cw(c452.5,964.31) 464.57,964.31 cw(c476.64,964.31) v1@468.1,972.84
  Bottom Layer w10: v1@461.03,979.91 ccw(c452.5,988.45) 464.57,988.45 ccw(c476.64,988.45) v1@468.1,979.91 ; v1(464.57,976.38) 464.57,1110.24 462.85,1111.95 462.85,1113.18 460.63,1115.4 460.63,1137.8 466.54,1143.7 U2.11
CTRSHOCKPOW: R19.2 U2.12 | length 189.7
  Top Layer w10: R19.2 v1(511.81,1086.61) ; R19.2@470.77,1080.41 cw(c485.76,1065.42) 485.76,1086.61 cw(c485.76,1107.81) R19.2@470.77,1092.82 ; v1@508.28,1083.08 ccw(c499.74,1074.54) 499.74,1086.61 ccw(c499.74,1098.69) v1@508.28,1090.15
  Bottom Layer w10: U2.12@505.54,1123.65 cw(c490.41,1108.52) 511.81,1108.52 ; U2.12@505.77,1123.52 cw(c503.68,1115.66) 511.81,1115.66 ; U2.12 511.81,1118.11 v1(511.81,1086.61) ; v1@508.28,1090.15 ccw(c499.74,1098.69) 511.81,1098.69 ccw(c523.88,1098.69) v1@515.35,1090.15
DECCUT: D2.1 Q3.3 U2.32 | length 1031.1
  Top Layer w10: Q3.3@73.24,1697.41 cw(c56.25,1677.17) 82.68,1677.17 ; Q3.3 82.68,1677.17 ; Q3.3@92.12,1697.41 ccw(c109.11,1677.17) 82.68,1677.17 ; v1@93.43,1261.81 ccw(c81.35,1261.81) 89.89,1270.35 ccw(c98.43,1278.88) v1@98.43,1266.81 ; v1(98.43,1261.81) 74.8,1285.43 74.8,1389.76 122.05,1437.01 122.05,1535.43 ; 132.59,1545.97 cw(c163.37,1515.19) D2.1@180.19,1555.34 ; 133.09,1626.76 ccw(c185.04,1678.71) D2.1@185.04,1605.24 ; 143.13,1556.51 cw(c169.59,1530.04) D2.1@184.05,1564.57 ; 150.16,1609.68 ccw(c185.04,1644.57) D2.1@185.04,1595.24 ; 152.1,1607.75 cw(c127.03,1582.68) D2.1@162.48,1582.68 ; 153.66,1567.05 cw(c175.81,1544.9) D2.1@187.91,1573.79 ; D2.1@176.33,1546.12 ccw(c157.15,1500.33) 122.05,1535.43 ; 82.68,1677.17 D2.1 161.42,1574.8 122.05,1535.43
  Bottom Layer w10: v1(98.43,1261.81) U2.32 ; v1@101.96,1258.28 cw(c110.5,1249.74) 110.5,1261.81 cw(c110.5,1273.88) v1@101.96,1265.35
GND: C1.2 C2.2 C3.2 C4.1 C5.2 C6.2 C7.2 C8.2 C9.2 C10.2 C11.2 C12.2 C13.2 C14.2 C15.2 J1.2 J2.1 J3.1 J3.3 J4.2 J5.3 Q1.2 Q2.2 Q5.2 Q8.2 R5.2 R6.2 R7.1 R13.1 R17.2 R22.2 R26.1 R28.2 S1.1 U1.2 U2.8 U2.23 U2.35 U2.47 | length 10686.7
  Top Layer w10: v1(299.21,1161.42) v1(421.26,1161.42) ; v1@302.75,1157.88 cw(c311.28,1149.35) 311.28,1161.42 cw(c311.28,1173.49) v1@302.75,1164.95 ; v1(338.58,1307.09) 374.02,1342.52 v1(381.89,1342.52) ; v1@338.58,1312.09 ccw(c338.58,1324.16) 347.12,1315.62 ccw(c355.65,1307.09) v1@343.58,1307.09 ; 359.91,1328.42 cw(c381.89,1306.44) v1@381.89,1337.52 ; v1@417.72,1157.88 ccw(c409.19,1149.35) 409.19,1161.42 ccw(c409.19,1173.49) v1@417.72,1164.95 ; J3.1@439.59,1587.97 ccw(c417.3,1610.26) 448.82,1610.26 ; J3.1@448.82,1578.74 448.82,1700.79 492.13,1744.09 Q2.2 531.5,1708.66 602.36,1708.66 R13.1 720.47,1740.16 S1.1 ; 448.82,1605.12 ccw(c483.08,1605.12) J3.1@458.85,1580.9 ; 448.82,1629.27 ccw(c507.22,1629.27) J3.1@465.92,1587.97 ; 450.83,1702.8 ccw(c405.6,1748.03) Q2.2@469.57,1748.03 ; 467.9,1719.87 ccw(c439.74,1748.03) Q2.2@479.57,1748.03 ; Q2.2@500,1733.35 cw(c500,1716.9) Q2.2@511.63,1728.53 ; Q2.2@504.68,1748.03 ccw(c535.01,1748.03) 513.57,1726.59 ; Q2.2@514.68,1748.03 ccw(c569.15,1748.03) 530.64,1709.52 ; 612.15,1718.45 ccw(c590.44,1740.16) R13.1@621.14,1740.16 ; R13.1@621.65,1727.95 cw(c629.92,1719.69) R13.1@629.92,1731.38 ; R13.1@644,1733.95 cw(c658.99,1718.96) 658.99,1740.16 cw(c658.99,1761.35) R13.1@644,1746.37 ; 658.81,1740.16 cw(c658.81,1654.87) S1.1@719.12,1715.18 ; 682.95,1740.16 cw(c682.95,1679.02) S1.1@726.19,1722.25 ; 707.1,1740.16 cw(c707.1,1703.16) S1.1@733.26,1729.32
  Top Layer w12: v1(74.8,1464.57) 34.5,1424.26 34.5,1199.18 64.39,1169.29 98.43,1169.29 125.98,1141.73 C5.2 ; 109.1,1158.61 cw(c82.38,1131.89) C5.2@120.17,1131.89
  Top Layer w15: 40.24,685.91 cw(c59.83,666.32) R6.2@64.44,693.64 ; R5.2@58.1,1074.15 cw(c68.51,1058.77) 81.64,1071.9 ; R6.2@58.55,684.54 ccw(c47.83,673.82) 47.83,688.98 ccw(c47.83,704.14) R6.2@58.55,693.42 ; R6.2@58.55,697.35 ccw(c47.83,708.07) 62.99,708.07 ccw(c78.15,708.07) R6.2@67.43,697.35 ; R6.2@61.95,678.85 ccw(c53.89,631.15) 19.69,665.36 ; C4.1@62.99,754.31 ccw(c62.99,778.98) 80.43,761.54 ; C6.2@62.99,950.41 cw(c62.99,925.75) 80.43,943.19 ; C6.2 94.49,929.13 ; R5.2 82.68,1070.87 94.49,1059.06 ; R5.2@66.51,1061.73 cw(c78.88,1043.45) 94.49,1059.06 ; R5.2@67.43,1066.43 cw(c78.15,1055.71) 78.15,1070.87 cw(c78.15,1086.03) R5.2@67.43,1075.31 ; v4(82.68,590.55) 43.31,590.55 19.69,614.17 19.69,665.35 ; 101.82,1105.76 cw(c125.98,1081.6) C5.2@125.98,1115.77 ; C5.2 122.05,1125.98 94.49,1098.43 94.49,1059.06 ; R26.1 356.3,665.35 Q8.2 364.17,627.95 v1(348.43,612.2) ; R26.1@298.42,659.92 cw(c311.56,637.15) 318.37,662.54 ; R26.1@299.72,660.91 cw(c310.44,650.19) 310.44,665.35 cw(c310.44,680.51) R26.1@299.72,669.79 ; R26.1@307.87,665.35 cw(c307.87,609.05) Q8.2@347.68,648.86 ; Q8.2@355.56,648.86 cw(c334.76,628.06) 364.17,628.06 cw(c393.59,628.06) Q8.2@372.79,648.86 ; 19.69,665.35 43.31,688.98 R6.2 C4.1 94.49,775.59 U1.2 94.49,929.13 ; 94.49,929.13 94.49,1059.06
  Top Layer w20: J3.3@285.64,1565.17 cw(c262.39,1541.92) 295.28,1541.92 cw(c328.16,1541.92) J3.3@304.91,1565.17 ; 295.28,1464.57 J3.3 ; C14.2@395.04,1502.85 ccw(c379.05,1574.8) J3.1 C14.2@452.76,1468.5 ; C14.2@399.38,1483.32 ccw(c384.59,1549.87) 452.76,1549.87 ; C14.2@403.71,1463.8 ccw(c390.13,1524.93) 452.76,1524.93 ; C14.2@408.05,1444.27 ccw(c395.67,1500) C14.2@452.76,1500 ; C14.2@412.39,1424.75 ccw(c401.21,1475.07) C14.2@452.76,1475.07 ; J3.1@443.12,1565.17 cw(c419.87,1541.92) 452.76,1541.92 cw(c485.64,1541.92) J3.1@462.39,1565.17
  Top Layer w60: J2.1@132.37,200.21 ccw(c164.55,180.3) 137.79,153.54 ; J2.1@132.44,193.38 cw(c166.46,215.43) 137.79,244.09 ; J2.1@137.8,184.71 cw(c258.24,184.71) C1.2@200.2,290.25 ; 137.8,224.67 cw(c201.7,224.67) C1.2@193.43,288.04 ; 151.19,257.49 ccw(c101.59,307.09) C1.2@171.73,307.09 ; 154.71,256.91 cw(c213.48,222.98) C1.2@195.92,288.53 ; 157.53,133.81 cw(c220.57,196.85) 131.42,196.85 cw(c230.08,196.85) C1.2@160.31,266.61 ; C15.2@200.79,1464.57 C14.2 C13.2 v2@661.42,1464.57 ; J1.2 345.28,99.61 ; J1.2@345.61,54.79 ccw(c322.7,77.03) 345.28,99.61 ; J1.2@345.75,55.09 ccw(c253.67,60.75) 318.9,125.98 ; v2(590.55,311.02) C3.2 C2.2 C1.2 137.8,244.09 ; C13.2@598.1,1445.42 cw(c612.57,1276.76) J4.2 v2@664.76,1463.98 ; C13.2@616.4,1443.56 ccw(c620.78,1486.52) v2@657.2,1463.32 ; v2(661.42,1460.63) v2@664.17,1463.39 ; v2@666.26,1461.86 ccw(c740.41,1480.65) 701.27,1414.93 ; 137.8,153.54 165.35,125.98 318.9,125.98 ; 137.8,153.54 J2.1 137.8,244.09 ; 318.9,125.98 345.28,99.61
  Bottom Layer w10: 127.9,1458.61 cw(c149.61,1436.9) C12.2@149.61,1467.6 ; C12.2 125.98,1456.69 125.98,1334.65 139.76,1320.87 U2.35 301.18,1320.87 314.96,1307.09 ; C10.2 250,1021.65 U2.23 250,1112.2 v1(299.21,1161.42) 314.96,1177.17 314.96,1307.09 ; C10.2@212.6,996.97 ccw(c212.6,1027.67) 234.31,1005.96 ; v1@294.21,1161.42 cw(c282.14,1161.42) 290.68,1152.88 cw(c299.21,1144.35) v1@299.21,1156.42 ; v1@299.21,1166.42 ccw(c299.21,1178.49) 307.75,1169.95 ccw(c316.28,1161.42) v1@304.21,1161.42 ; v1@335.05,1303.55 ccw(c326.51,1295.02) 326.51,1307.09 ccw(c326.51,1319.16) v1@335.05,1310.62 ; v1(338.58,1307.09) 314.96,1307.09 ; v1(381.89,1342.52) 413.39,1342.52 427.17,1356.3 U2.47 427.17,1438.98 R28.2 C11.2 ; v1@385.43,1338.98 cw(c393.96,1330.45) 393.96,1342.52 cw(c393.96,1354.59) v1@385.43,1346.06 ; R28.2@385.83,1467.6 cw(c385.83,1436.9) 407.54,1458.61 ; R28.2@392.03,1474.11 cw(c407.02,1459.12) 407.02,1480.31 cw(c407.02,1501.51) R28.2@392.03,1486.52 ; R28.2@394.61,1476.38 ccw(c406.3,1476.38) R28.2@398.03,1468.11 ; v1(421.26,1161.42) 425.2,1161.42 466.54,1202.76 U2.8 549.21,1202.76 565.77,1219.31 565.77,1235.41 590.55,1260.19 C15.2@590.55,1314.96 ; v1@421.26,1166.42 ccw(c421.26,1187.99) 436.52,1172.74 ; C11.2@467.62,1475.5 ccw(c456,1463.87) 456,1480.31 ccw(c456,1496.76) C11.2@467.62,1485.13 ; 567.46,1237.09 ccw(c532.9,1271.65) C9.2@581.77,1271.65 ; C9.2@583.77,1276.47 ccw(c567.39,1292.85) 590.55,1292.85 ; C15.2@583.77,1310.14 cw(c567.39,1293.77) 590.55,1293.77 ; 584.53,1254.17 ccw(c567.04,1271.65) C9.2@591.77,1271.65 ; C9.2@590.55,1283.34 ccw(c600.27,1283.34) C9.2@593.4,1276.47 ; C15.2@590.55,1303.27 cw(c600.27,1303.27) C15.2@593.4,1310.14 ; R22.2 625.98,1185.04 625.98,1240.16 C9.2 ; R22.2@598.43,1162.32 ccw(c598.43,1174.01) R22.2@606.69,1165.75 ; R22.2@607.2,1153.54 cw(c637.9,1153.54) 616.2,1175.25 ; C9.2@607.2,1271.65 ccw(c637.9,1271.65) 616.2,1249.95
  Bottom Layer w12: v1(74.8,1464.57) 90.55,1480.31 C12.2 ; C12.2@145.5,1476.21 ccw(c135.58,1466.29) 135.58,1480.32 ccw(c135.58,1494.34) C12.2@145.5,1484.42
  Bottom Layer w15: v4@82.68,593.05 ccw(c82.68,618.1) R7.1@100.39,600.39 ; v4@83.45,592.93 ccw(c88.68,609.12) R7.1@97.19,594.38 ; R7.1@100.24,604 cw(c82.68,608.74) v4(82.68,590.55) v4@90.55,590.55 ; R7.1@101.86,597.92 cw(c91.14,587.2) 106.3,587.2 cw(c121.46,587.2) R7.1@110.74,597.92 ; Q1.2@105.56,515.01 cw(c65.75,475.2) 122.05,475.2 ; R7.1@105.76,596.11 ccw(c104.13,576.98) v4@90.55,590.55 ; 106.3,587.8 ccw(c162.6,587.8) Q1.2@122.79,547.99 ; 122.05,237.58 ccw(c178.52,237.58) J2.1@138.59,197.64 ; C7.2@122.05,273.79 ccw(c214.74,273.79) J2.1@149.2,208.25 ; 124.41,264.98 cw(c137.68,268.54) C7.2@125.78,275.4 ; J2.1 122.05,212.6 C7.2 C8.2 122.05,523.62 Q1.2 106.3,539.37 R7.1 v4@90.55,590.55 ; R17.2@322.33,593.98 cw(c311.61,583.27) 326.77,583.27 cw(c341.93,583.27) R17.2@331.21,593.98 ; Q5.2@326.03,495.32 cw(c305.23,474.52) 334.65,474.52 cw(c364.06,474.52) Q5.2@343.26,495.32 ; 326.77,568.11 ccw(c383.07,568.11) Q5.2@343.26,528.3 ; R17.2@330.69,611.21 ccw(c339,621.63) v1(348.43,612.2) ; v1@346.27,613.48 cw(c326.77,625.03) R17.2 ; v1(348.43,612.2) 338.58,602.36 R17.2 ; v2(590.55,311.02) 354.92,311.02 334.65,331.3 Q5.2 326.77,519.69 R17.2
  Bottom Layer w50: 661.42,452.76 v2(661.42,1460.63)
  Bottom Layer w60: v2(590.55,311.02) 661.42,381.89 661.42,452.76 665.35,456.69 J5.3
LEDBLUE: D4.2 U2.16 | length 1258.3
  Top Layer w10: v1(397.64,1299.21) v1(488.19,1389.76) ; v1@397.64,1304.21 ccw(c397.64,1316.28) 406.17,1307.75 ccw(c414.71,1299.21) v1@402.64,1299.21 ; v1@483.19,1389.76 cw(c471.12,1389.76) 479.65,1381.23 cw(c488.19,1372.69) v1@488.19,1384.76
  Bottom Layer w10: U2.16 387.8,1096.46 342.52,1141.73 342.52,1244.09 v1(397.64,1299.21) ; v1@392.64,1299.21 cw(c380.57,1299.21) 389.1,1290.68 cw(c397.64,1282.14) v1@397.64,1294.21 ; D4.2 492.13,1937.01 563.99,1937.01 572.18,1928.81 572.18,1471.98 489.97,1389.76 v1(488.19,1389.76) ; D4.2@452.76,1916.26 ccw(c452.76,1961.22) 484.55,1929.43 ccw(c516.34,1897.64) D4.2@471.38,1897.64 ; v1@488.19,1394.76 ccw(c488.19,1411.12) 499.76,1399.56
LEDRED: D3.2 U2.15 | length 1520
  Top Layer w10: v1(429.13,1299.21) v1(519.69,1389.76) ; v1@429.13,1304.21 ccw(c429.13,1316.28) 437.67,1307.75 ccw(c446.2,1299.21) v1@434.13,1299.21 ; v1@514.68,1389.76 cw(c502.61,1389.76) 511.15,1381.23 cw(c519.69,1372.69) v1@519.69,1384.76
  Bottom Layer w10: D3.2 281.28,1954.51 569.12,1954.51 588.18,1935.44 588.18,1458.26 v1(519.69,1389.76) ; D3.2@224.41,1916.26 ccw(c224.41,1961.22) 256.2,1929.43 ccw(c287.99,1897.64) D3.2@243.03,1897.64 ; U2.15 407.48,1104.33 367.61,1144.2 367.61,1237.69 v1(429.13,1299.21) ; v1@424.13,1299.21 cw(c412.06,1299.21) 420.6,1290.68 cw(c429.13,1282.14) v1@429.13,1294.21 ; v1@519.69,1394.76 ccw(c519.69,1406.83) 528.22,1398.3 ccw(c536.76,1389.76) v1@524.68,1389.76
NetB1_2: B1.2 Q1.3 | length 920.6
  Bottom Layer w15: Q1.3@66.19,428.39 cw(c45.39,407.59) 74.8,407.59 cw(c104.22,407.59) Q1.3@83.42,428.39 ; Q1.3 74.8,169.29 110.24,133.86 503.94,133.86 551.18,86.61 ; B1.2@540.59,63.34 ccw(c520.31,86.61) 551.18,86.61 ; B1.2 551.18,86.61 ; B1.2@561.77,63.34 cw(c582.05,86.61) 551.18,86.61
NetC6_1: C6.1 R1.2 R5.1 U1.4 | length 330.2
  Top Layer w12: R1.2@120.48,1006.31 cw(c107.2,993.03) 125.98,993.03 cw(c144.77,993.03) R1.2@131.49,1006.31 ; R1.2@120.48,1025.19 ccw(c107.2,1038.47) 125.98,1038.47 ccw(c144.77,1038.47) R1.2@131.49,1025.19 ; R5.1@120.48,1061.43 cw(c107.2,1048.15) 125.98,1048.15 cw(c144.77,1048.15) R5.1@131.49,1061.43 ; C6.1@121.88,950.62 cw(c111.96,940.7) 125.98,940.7 cw(c140.01,940.7) C6.1@130.09,950.62 ; C6.1@121.88,970.64 ccw(c111.96,980.56) 125.98,980.56 ccw(c140.01,980.56) C6.1@130.09,970.64 ; 125.98,939.7 ccw(c160.18,939.7) U1.4@136,915.53 ; R5.1 R1.2 C6.1 125.98,908.46 U1.4
NetC13_1: C13.1 C14.1 C15.1@200.79,1228.35 J4.1 Q9.2 | length 1473.6
  Top Layer w60: C15.1@200.79,1228.35 C14.1 C13.1 ; C13.1@559.35,1245.28 cw(c638.95,1208.96) 638.95,1296.46 ; C13.1@582.87,1214.76 cw(c459.78,1091.67) Q9.2@633.86,1091.67 ; C13.1@586.85,1211.71 cw(c522.86,1100.88) Q9.2@646.48,1134 ; Q9.2@596.85,1113.3 ccw(c553.26,1181.1) C13.1@633.86,1181.1 ; C13.1@613.94,1220.37 cw(c732.28,1166.38) J4.1 654.72,1296.46 C13.1 ; C13.1@615.67,1228.35 cw(c685.81,1228.35) 636.21,1277.95 ; Q9.2 C13.1@633.86,1181.1 ; Q9.2@670.87,1113.3 cw(c714.46,1181.1) C13.1@633.86,1181.1 ; C13.1 C13.1@633.86,1181.1
NetD3_1: D3.1 R27.2 | length 214.2
  Bottom Layer w10: R27.2 232.28,1826.77 D3.1 ; R27.2@241.06,1818.9 cw(c281.27,1818.9) 252.84,1847.33 ; D3.1@284.53,1897.64 cw(c239.57,1897.64) 271.36,1865.85 cw(c303.15,1834.06) D3.1@303.15,1879.02
NetD4_1: D4.1 R29.2 | length 208.7
  Bottom Layer w10: R29.2@464.57,1818.9 464.57,1830.71 D4.1 ; R29.2@469.41,1818.9 cw(c509.61,1818.9) 481.19,1847.33 ; D4.1@512.87,1897.64 cw(c467.92,1897.64) 499.71,1865.85 cw(c531.5,1834.06) D4.1@531.5,1879.02
NetQ1_1: Q1.1 R4.2 R7.2 | length 349.3
  Bottom Layer w10: Q1.1@25.05,549.75 ccw(c-19.03,593.83) R7.2@43.31,593.83 ; Q1.1@32.12,542.68 ccw(c5.11,569.69) 43.31,569.69 ; Q1.1 43.31,539.37 R7.2 R4.2 ; R7.2@35.7,597.97 cw(c10.82,583.61) 38.57,576.17 ; R7.2@37.1,596.15 cw(c22.11,581.17) 43.31,581.17 cw(c64.5,581.17) R7.2@49.52,596.15 ; R7.2@37.1,616.44 ccw(c22.11,631.43) 43.31,631.43 ccw(c64.5,631.43) R7.2@49.52,616.44 ; R4.2@37.1,655.21 cw(c22.11,640.22) 43.31,640.22 cw(c64.5,640.22) R4.2@49.52,655.21 ; 41.33,586.47 cw(c54.53,582.93) R7.2@47.7,594.76
NetQ2_3: Q2.3 R12.2 | length 200
  Top Layer w10: R12.2 374.02,1740.16 ; R12.2@325.11,1733.95 cw(c340.09,1718.96) 340.09,1740.16 cw(c340.09,1761.35) R12.2@325.11,1746.37 ; Q2.3@383.17,1711.19 ccw(c350.73,1716.86) 374.02,1740.16 ; Q2.3@386.01,1728.16 ccw(c397.64,1739.79) Q2.3@397.64,1723.35 ; Q2.3@387.62,1726.55 cw(c373.89,1712.81) Q2.3@393.02,1709.47 ; Q2.3 374.02,1740.16
NetQ3_1: Q3.1 R11.2 R12.1 | length 361.1
  Top Layer w10: Q3.1 177.17,1677.17 R11.2 R12.1 ; Q3.1@180.48,1665.98 cw(c207.49,1638.97) 207.49,1677.17 ; Q3.1@187.55,1658.91 cw(c231.63,1614.83) R11.2@231.63,1677.17 ; 213.96,1672.43 cw(c221.4,1644.68) R11.2@235.77,1669.56 ; 224.26,1675.19 ccw(c220.73,1688.38) R11.2@232.55,1681.56 ; R11.2@233.95,1670.96 ccw(c218.96,1655.97) 218.96,1677.17 ccw(c218.96,1698.36) R11.2@233.95,1683.37 ; R11.2@254.24,1670.96 cw(c269.23,1655.97) 269.23,1677.17 cw(c269.23,1698.36) R11.2@254.24,1683.37 ; R12.1@304.82,1670.96 ccw(c289.83,1655.97) 289.83,1677.17 ccw(c289.83,1698.36) R12.1@304.82,1683.37
NetQ4_1: Q4.1 R14.1 R15.1 | length 355.6
  Bottom Layer w10: R14.1@517.41,399.3 cw(c483.42,365.31) 531.5,365.31 ; R14.1@517.41,419.59 ccw(c483.42,453.59) 531.5,453.59 ; Q4.1@521.11,477.81 cw(c496.04,452.74) 531.5,452.74 cw(c566.95,452.74) Q4.1@541.88,477.81 ; R14.1@524.49,406.37 cw(c507.56,389.45) 531.5,389.45 ; R14.1@524.49,412.52 ccw(c507.56,429.45) 531.5,429.45 ; R15.1@525.29,348.73 ccw(c510.3,363.72) 531.5,363.72 ccw(c552.69,363.72) R15.1@537.7,348.73 ; R15.1 Q4.1
NetQ5_1: Q5.1 R16.1 R17.1 | length 365.7
  Bottom Layer w10: Q5.1@245.52,530.07 ccw(c201.44,574.15) 263.78,574.15 ; Q5.1@252.59,523 ccw(c225.59,550.01) 263.78,550.01 ; Q5.1 263.78,519.69 R17.1 R16.1 R16.1@330.71,665.35 ; R17.1@257.57,592.22 cw(c242.58,577.23) 263.78,577.23 cw(c284.98,577.23) R17.1@269.99,592.22 ; R17.1@263.78,615.08 ccw(c263.78,645.78) 285.49,624.07 ; R17.1@272.56,606.3 cw(c284.25,606.3) R17.1@275.98,614.57 ; 305.06,643.65 cw(c326.77,621.94) R16.1@326.77,652.64 ; R16.1@314.57,653.15 ccw(c306.3,661.42) R16.1@317.99,661.42
NetQ6_1: Q6.1 R18.1 R19.1 | length 379.9
  Top Layer w10: Q6.1 330.71,1023.62 R18.1 R19.1 ; Q6.1@330.08,1008.5 cw(c366.6,971.99) 366.6,1023.62 ; Q6.1@337.16,1001.43 cw(c390.74,947.84) R18.1@390.74,1023.62 ; 368.77,1017.73 ccw(c363.06,1039.04) R18.1@382.16,1028.01 ; 369.94,1018.05 cw(c375.21,998.41) R18.1@385.37,1016.02 ; R18.1@383.56,1017.41 ccw(c368.57,1002.43) 368.57,1023.62 ccw(c368.57,1044.82) R18.1@383.56,1029.83 ; R18.1@403.85,1017.41 cw(c418.83,1002.43) 418.83,1023.62 cw(c418.83,1044.82) R18.1@403.85,1029.83 ; R19.1@450.48,1017.41 ccw(c435.5,1002.43) 435.5,1023.62 ccw(c435.5,1044.82) R19.1@450.48,1029.83
NetQ6_3: Q6.3 Q7.2 R20.2 | length 538.6
  Top Layer w10: Q6.3@221.9,1040.8 cw(c196.83,1015.73) 232.28,1015.73 cw(c267.74,1015.73) Q6.3@242.67,1040.8 ; Q6.3 232.28,948.82 267.72,913.39 Q7.2 326.77,905.51 R20.2 ; Q7.2@300.64,903 ccw(c275.57,877.93) 275.57,913.39 ccw(c275.57,948.84) Q7.2@300.64,923.77 ; Q7.2@330.08,916.7 ccw(c357.09,943.71) 357.09,905.51 ; Q7.2@337.16,923.77 ccw(c381.23,967.85) R20.2@381.23,905.51 ; 363.57,910.24 ccw(c371.01,938) R20.2@385.37,913.12 ; 373.87,907.49 cw(c370.33,894.29) R20.2@382.16,901.12 ; R20.2@383.56,899.3 ccw(c368.57,884.32) 368.57,905.51 ccw(c368.57,926.71) R20.2@383.56,911.72
NetQ7_1: Q7.1 R20.1 R23.1 | length 357.1
  Top Layer w10: Q7.1 326.77,842.52 R20.1 R23.1 ; Q7.1@330.08,831.33 cw(c357.09,804.33) 357.09,842.52 ; Q7.1@337.16,824.26 cw(c381.23,780.18) R20.1@381.23,842.52 ; 363.57,837.79 cw(c371.01,810.03) R20.1@385.37,834.92 ; 373.87,840.55 ccw(c370.33,853.74) R20.1@382.16,846.91 ; R20.1@383.56,836.31 ccw(c368.57,821.32) 368.57,842.52 ccw(c368.57,863.72) R20.1@383.56,848.73 ; R20.1@403.85,836.31 cw(c418.83,821.32) 418.83,842.52 cw(c418.83,863.72) R20.1@403.85,848.73 ; R23.1@450.48,836.31 ccw(c435.5,821.32) 435.5,842.52 ccw(c435.5,863.72) R23.1@450.48,848.73
NetQ7_3: Q7.3 R24.2 | length 401.2
  Top Layer w12: 197.97,668.17 ccw(c215.5,685.7) R24.2@219.12,661.18 ; R24.2@212.78,660.09 ccw(c200.79,649.07) 200.79,665.35 ; R24.2@212.78,670.62 cw(c200.79,681.64) 200.79,665.35 ; R24.2@217.37,673.05 cw(c211.15,715.08) 181.1,685.04 ; R24.2 200.79,665.35 ; Q7.3@222.61,864.34 cw(c199.24,840.98) 232.28,840.98 cw(c265.32,840.98) Q7.3@241.96,864.34 ; Q7.3 232.28,799.21 181.1,748.03 181.1,685.04 ; 181.1,685.04 200.79,665.35
NetQ8_1: Q8.1 R24.1 R26.2 | length 325.9
  Top Layer w12: R24.1 R26.2 356.3,728.35 Q8.1 ; R24.1@231.88,722.85 cw(c245.16,709.57) 245.16,728.35 cw(c245.16,747.13) R24.1@231.88,733.85 ; R26.2@281.9,722.85 ccw(c268.62,709.57) 268.62,728.35 ccw(c268.62,747.13) R26.2@281.9,733.85 ; R26.2@299.17,735.08 ccw(c312.52,758.22) 319.44,732.42 ; R26.2@300.78,722.85 cw(c314.06,709.57) 314.06,728.35 cw(c314.06,747.13) R26.2@300.78,733.85 ; R26.2@304.25,728.35 ccw(c304.25,788.27) Q8.1@346.62,745.9 ; 333.22,728.35 ccw(c333.22,759.3) Q8.1@355.11,737.41
NetQ8_3: Q8.3 R21.2 R25.2 | length 391.7
  Top Layer w15: Q8.3@442.17,688.23 cw(c421.37,667.43) 450.79,667.43 cw(c480.2,667.43) Q8.3@459.4,688.23 ; Q8.3 450.79,651.57 492.13,610.24 570.87,610.24 594.49,633.86 594.49,641.73 R21.2@641.73,641.73 ; 578.2,617.57 ccw(c554.04,641.73) R25.2@588.21,641.73 ; R25.2@598.93,637.29 cw(c609.65,626.57) 609.65,641.73 cw(c609.65,656.89) R25.2@598.93,646.17 ; R21.2@637.29,637.29 ccw(c626.57,626.57) 626.57,641.73 ccw(c626.57,656.89) R21.2@637.29,646.17
NetQ9_1: Q9.1 R25.1 | length 230
  Top Layer w15: R25.1@527.06,654.05 ccw(c483.07,698.03) Q9.1@545.28,698.03 ; R25.1@531.5,641.73 545.28,655.51 Q9.1 ; Q9.1@533.88,702.93 cw(c506.35,675.41) 545.28,675.41 cw(c584.2,675.41) Q9.1@556.68,702.93 ; R25.1@537.66,643.44 ccw(c519.28,661.82) 545.28,661.82
NRST: C15.1@594.49,1377.95 U2.7 | length 236.3
  Bottom Layer w10: U2.7 539.93,1222.44 547.24,1229.76 547.24,1334.65 C15.1@590.55,1377.95 ; 575.56,1362.97 ccw(c560.58,1377.95) C15.1@581.77,1377.95 ; C15.1@580.32,1367.72 cw(c588.58,1359.45) C15.1@588.58,1371.14
SPARE1: R30.2 U2.21 | length 225.8
  Bottom Layer w10: R30.2@289.37,958.93 ccw(c309.33,958.93) R30.2@295.22,944.82 ; 289.37,983.08 ccw(c333.47,983.08) R30.2@302.29,951.89 ; 289.37,1007.22 ccw(c357.61,1007.22) R30.2@309.36,958.96 ; U2.21 289.37,962.6 R30.2
SPARE2: R31.2 U2.22 | length 294.4
  Bottom Layer w10: U2.22 269.69,907.48 ; 280.09,897.07 ccw(c295.17,912.15) R31.2@303.63,892.58 ; R31.2@290.5,886.67 ccw(c301.45,897.62) R31.2@307.6,883.4 ; R31.2@295.68,885.15 ccw(c287.4,880.03) 287.4,889.76 ; R31.2@295.68,894.38 cw(c287.4,899.5) 287.4,889.76 ; R31.2@299.66,901.76 cw(c288.88,926.68) 269.69,907.48 ; R31.2 287.4,889.76 ; 269.69,907.48 287.4,889.76
SWCLK: J5.2 U2.37 | length 2011.9
  Top Layer w10: v1(102.36,1338.58) 169.29,1338.58 v1(200.79,1370.08) ; v1@105.9,1335.05 cw(c114.43,1326.51) 114.43,1338.58 cw(c114.43,1350.65) v1@105.9,1342.12 ; v1(173.23,413.39) 173.48,413.64 393.95,413.64 405.26,424.94 685.29,424.94 J5.2 ; v1@176.76,409.85 cw(c185.91,400.71) 185.91,413.64 ; v1@176.76,416.92 ccw(c184.69,424.85) 184.69,413.64 ; v1@195.79,1370.08 cw(c183.72,1370.08) 192.25,1361.54 cw(c200.79,1353.01) v1@200.79,1365.08 ; J5.2@713.66,377.95 ccw(c668.7,377.95) 700.49,409.74 ccw(c732.28,441.53) J5.2@732.28,396.57
  Bottom Layer w10: v1@98.83,1335.05 ccw(c90.29,1326.51) 90.29,1338.58 ccw(c90.29,1350.65) v1@98.83,1342.12 ; v1(102.36,1338.58) 83.67,1338.58 30,1284.91 30,829.26 71.61,787.65 138.29,787.65 165.48,760.46 165.48,681.23 145.67,661.42 145.67,433.07 165.35,413.39 v1(173.23,413.39) ; 151.25,427.49 ccw(c173.23,449.47) v1@173.23,418.39 ; v1(200.79,1370.08) U2.37 ; v1@200.79,1375.08 ccw(c200.79,1387.15) 209.32,1378.61 ccw(c217.86,1370.08) v1@205.79,1370.08
SWDIO: J5.4 U2.34 | length 1769.1
  Top Layer w10: v1(169.29,444.88) 173.23,440.94 637.8,440.94 J5.4 ; v1@172.83,448.42 ccw(c190.87,466.46) 190.87,440.94 ; J5.4@713.66,535.43 cw(c668.7,535.43) 700.49,503.64 cw(c732.28,471.85) J5.4@732.28,516.81
  Bottom Layer w10: v1(169.29,444.88) 161.67,452.5 161.67,654.79 181.48,674.6 181.48,767.08 144.91,803.65 78.24,803.65 46,835.89 46,1278.28 68.9,1301.18 U2.34
TTL1_RX: R9.2 U2.31 | length 1381.1
  Bottom Layer w10: U2.31 198.82,1242.13 214.32,1226.63 214.32,1111.95 208.66,1106.3 101.62,1106.3 78,1082.68 78,917.32 134.05,861.27 232.22,861.27 291.59,801.9 291.59,734.97 313.71,712.85 368.58,712.85 389.76,691.67 389.76,389.76 437.01,342.52 R9.2 ; U2.31@191.34,1241.61 cw(c191.34,1222.32) 204.98,1235.96 ; 413.67,365.86 ccw(c448.82,401.01) R9.2@448.82,351.3 ; 430.74,348.79 ccw(c448.82,366.87) R9.2@448.82,341.3
TTL1_TX: R8.2 U2.30 | length 1225.9
  Bottom Layer w10: U2.30 100.39,1222.44 62,1184.05 62,898.63 115.36,845.27 225.59,845.27 275.59,795.28 275.59,728.35 307.09,696.85 361.95,696.85 373.76,685.04 373.76,342.77 R8.2 ; R8.2@367.81,348.73 ccw(c353.43,363.11) 373.76,363.11 ; 373.76,364.32 ccw(c395.82,364.32) R8.2@380.22,348.73
WAKEUP: D1.2 D2.2 R22.1 U2.10 | length 1870.5
  Top Layer w10: D2.2@51.18,1544.37 cw(c51.18,1470.9) 103.13,1522.85 ; D2.2@51.18,1554.37 cw(c51.18,1505.04) 86.06,1539.92 ; D2.2 106.05,1519.94 106.05,1452.5 55.12,1401.57 55.12,1240.16 133.86,1161.42 137.8,1161.42 196.85,1102.36 263.78,1102.36 275.59,1090.55 275.59,1066.93 291.34,1051.18 511.81,1051.18 v1(511.81,1055.12) ; D2.2@73.74,1566.93 ccw(c109.19,1566.93) 84.12,1541.86 ; 490.24,1051.18 ccw(c490.24,1076.69) v1@508.28,1058.65
  Bottom Layer w10: D1.2 594.49,913.39 R22.1 ; D1.2@500,833.58 ccw(c500,869.04) 525.07,843.97 ; U2.10 545.28,1163.39 555.52,1153.14 555.52,1129.52 R22.1 ; v1(511.81,1055.12) 559.06,1055.12 R22.1 ; D1.2@512.56,811.02 cw(c561.89,811.02) 527.01,845.9 ; v1@515.35,1051.58 cw(c523.88,1043.05) 523.88,1055.12 cw(c523.88,1067.19) v1@515.35,1058.65 ; D1.2@522.56,811.02 cw(c596.03,811.02) 544.08,862.98 ; 572.78,1068.84 ccw(c551.07,1090.55) 581.77,1090.55 ccw(c551.07,1090.55) 572.78,1112.26 ; R22.1@582.28,1078.35 cw(c590.55,1070.08) R22.1@590.55,1081.77 ; R22.1@582.28,1102.75 ccw(c590.55,1111.02) R22.1@590.55,1099.33 ; R22.1@588.28,1084.34 cw(c573.29,1069.36) 594.49,1069.36 cw(c615.68,1069.36) R22.1@600.7,1084.34
XTAL: U2.5
YL_AUOUT: D1.1 Q4.3 | length 283.4
  Bottom Layer w10: D1.1@476.17,661.21 cw(c437.66,622.7) 492.13,622.7 cw(c546.59,622.7) D1.1@508.08,661.21 ; Q4.3@481.74,600.94 ccw(c456.67,626) 492.13,626 ccw(c527.58,626) Q4.3@502.51,600.94 ; D1.1@483.25,668.28 cw(c461.81,646.85) 492.13,646.85 cw(c522.45,646.85) D1.1@501.01,668.28 ; Q4.3 D1.1
YL_AUX: J2.6 R15.2 | length 186.6
  Bottom Layer w10: J2.6@518.33,210.02 ccw(c486.54,241.81) 531.5,241.81 ccw(c576.45,241.81) J2.6@544.66,210.02 ; R15.2@525.29,273.32 cw(c510.3,258.33) 531.5,258.33 cw(c552.69,258.33) R15.2@537.7,273.32 ; J2.6 R15.2
YL_EN: R16.2 U2.17 | length 672.5
  Top Layer w10: v1@248.43,779.13 cw(c258.91,768.65) 258.91,783.46 ; v1(251.97,775.59) 259.84,783.46 ; v1@252.26,780.58 ccw(c252.84,790.46) 259.84,783.46 ; v1@255.5,772.06 cw(c283.05,744.51) 283.05,783.46 ; v1@256.96,775.88 cw(c266.84,776.46) 259.84,783.46 ; v1@311.43,779.93 ccw(c302.89,771.39) 302.89,783.46 ccw(c302.89,795.54) v1@311.43,787 ; v1(314.96,783.46) 259.84,783.46
  Bottom Layer w10: v1@246.97,775.59 cw(c234.9,775.59) 243.43,767.06 cw(c251.97,758.52) v1@251.97,770.59 ; v1(251.97,775.59) 219.29,742.91 219.29,688.98 242.91,665.35 ; R16.2@257.5,659.22 ccw(c242.91,644.94) 242.91,665.35 ; R16.2@257.5,671.49 cw(c242.91,685.77) 242.91,665.35 ; R16.2 242.91,665.35 ; v1(314.96,783.46) 334.65,803.15 334.65,984.25 368.11,1017.72 U2.17 ; v1@314.96,788.46 ccw(c314.96,800.54) 323.5,792 ccw(c332.03,783.46) v1@319.96,783.46
YL_ENOUT: J2.3 Q5.3 R3.1 | length 450.6
  Bottom Layer w10: Q5.3@284.89,406.94 cw(c259.82,381.87) 295.28,381.87 cw(c330.73,381.87) Q5.3@305.66,406.94 ; R3.1@289.07,348.73 ccw(c274.08,363.72) 295.28,363.72 ccw(c316.47,363.72) R3.1@301.48,348.73 ; J2.3 330.71,232.28 330.71,307.09 R3.1 Q5.3 ; J2.3@295.28,215.47 ccw(c295.28,260.43) 327.07,228.64 ccw(c358.86,196.85) J2.3@313.9,196.85 ; R3.1@299.21,333.74 cw(c299.21,322.05) R3.1@307.48,330.32 ; R3.1@307.99,342.52 ccw(c338.69,342.52) 316.98,320.81
YL_RX: J2.4 R8.1 | length 186.6
  Bottom Layer w10: J2.4@360.85,210.02 ccw(c329.06,241.81) 374.02,241.81 ccw(c418.97,241.81) J2.4@387.18,210.02 ; R8.1@367.81,273.32 cw(c352.82,258.33) 374.02,258.33 cw(c395.21,258.33) R8.1@380.22,273.32 ; J2.4 R8.1
YL_SET: U2.29
YL_TX: J2.5 R9.1 | length 186.6
  Bottom Layer w10: J2.5@439.59,210.02 ccw(c407.8,241.81) 452.76,241.81 ccw(c497.71,241.81) J2.5@465.92,210.02 ; R9.1@446.55,273.32 cw(c431.56,258.33) 452.76,258.33 cw(c473.95,258.33) R9.1@458.96,273.32 ; J2.5 R9.1
pads on no net: J2.7 J3.2 R30.1 R31.1 U2.2 U2.3 U2.4 U2.6 U2.18 U2.19 U2.20 U2.25 U2.26 U2.27 U2.28 U2.38 U2.39 U2.40 U2.41 U2.42 U2.43 U2.45 U2.46

## Keep-outs
Keep-Out Layer:
  the board outline again, w6

## Silkscreen, mask and mechanical layers (free items; w line width, h text height)
Top Overlay:
  text "+" at 700.79,1177.17 h60
  text "+" at 716.54,185.04 h40
  text "- +" at 326.77,141.73 h30 r180
  text "- +" at 547.24,141.73 h30 r180
Bottom Solder:
  lines w30: 590.55,311.02 661.42,381.89 661.42,1460.63